# EAGLE board Flipdot (EAGLE 8.1.1)
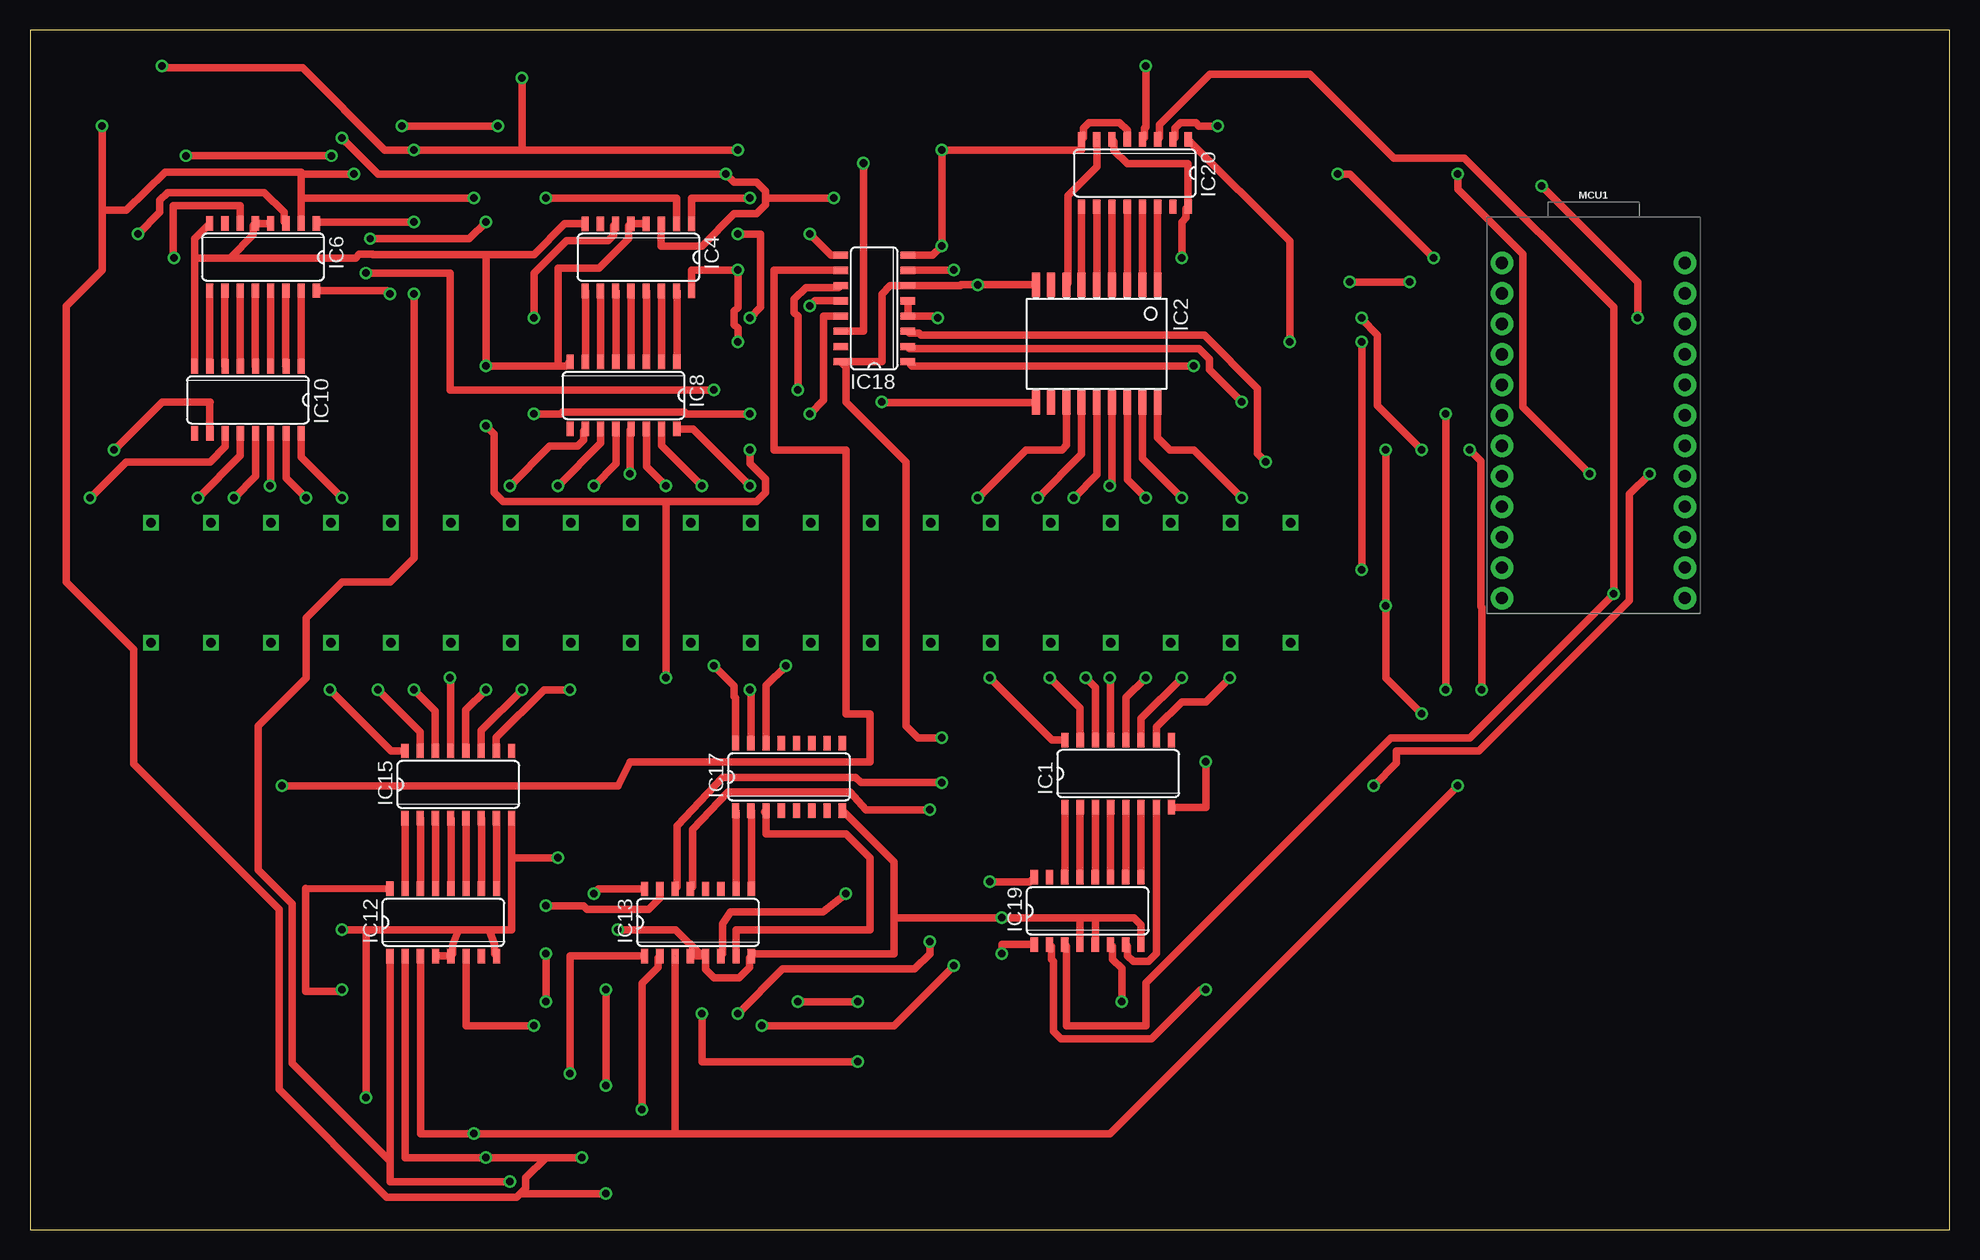
[diagram p0: board, top side]
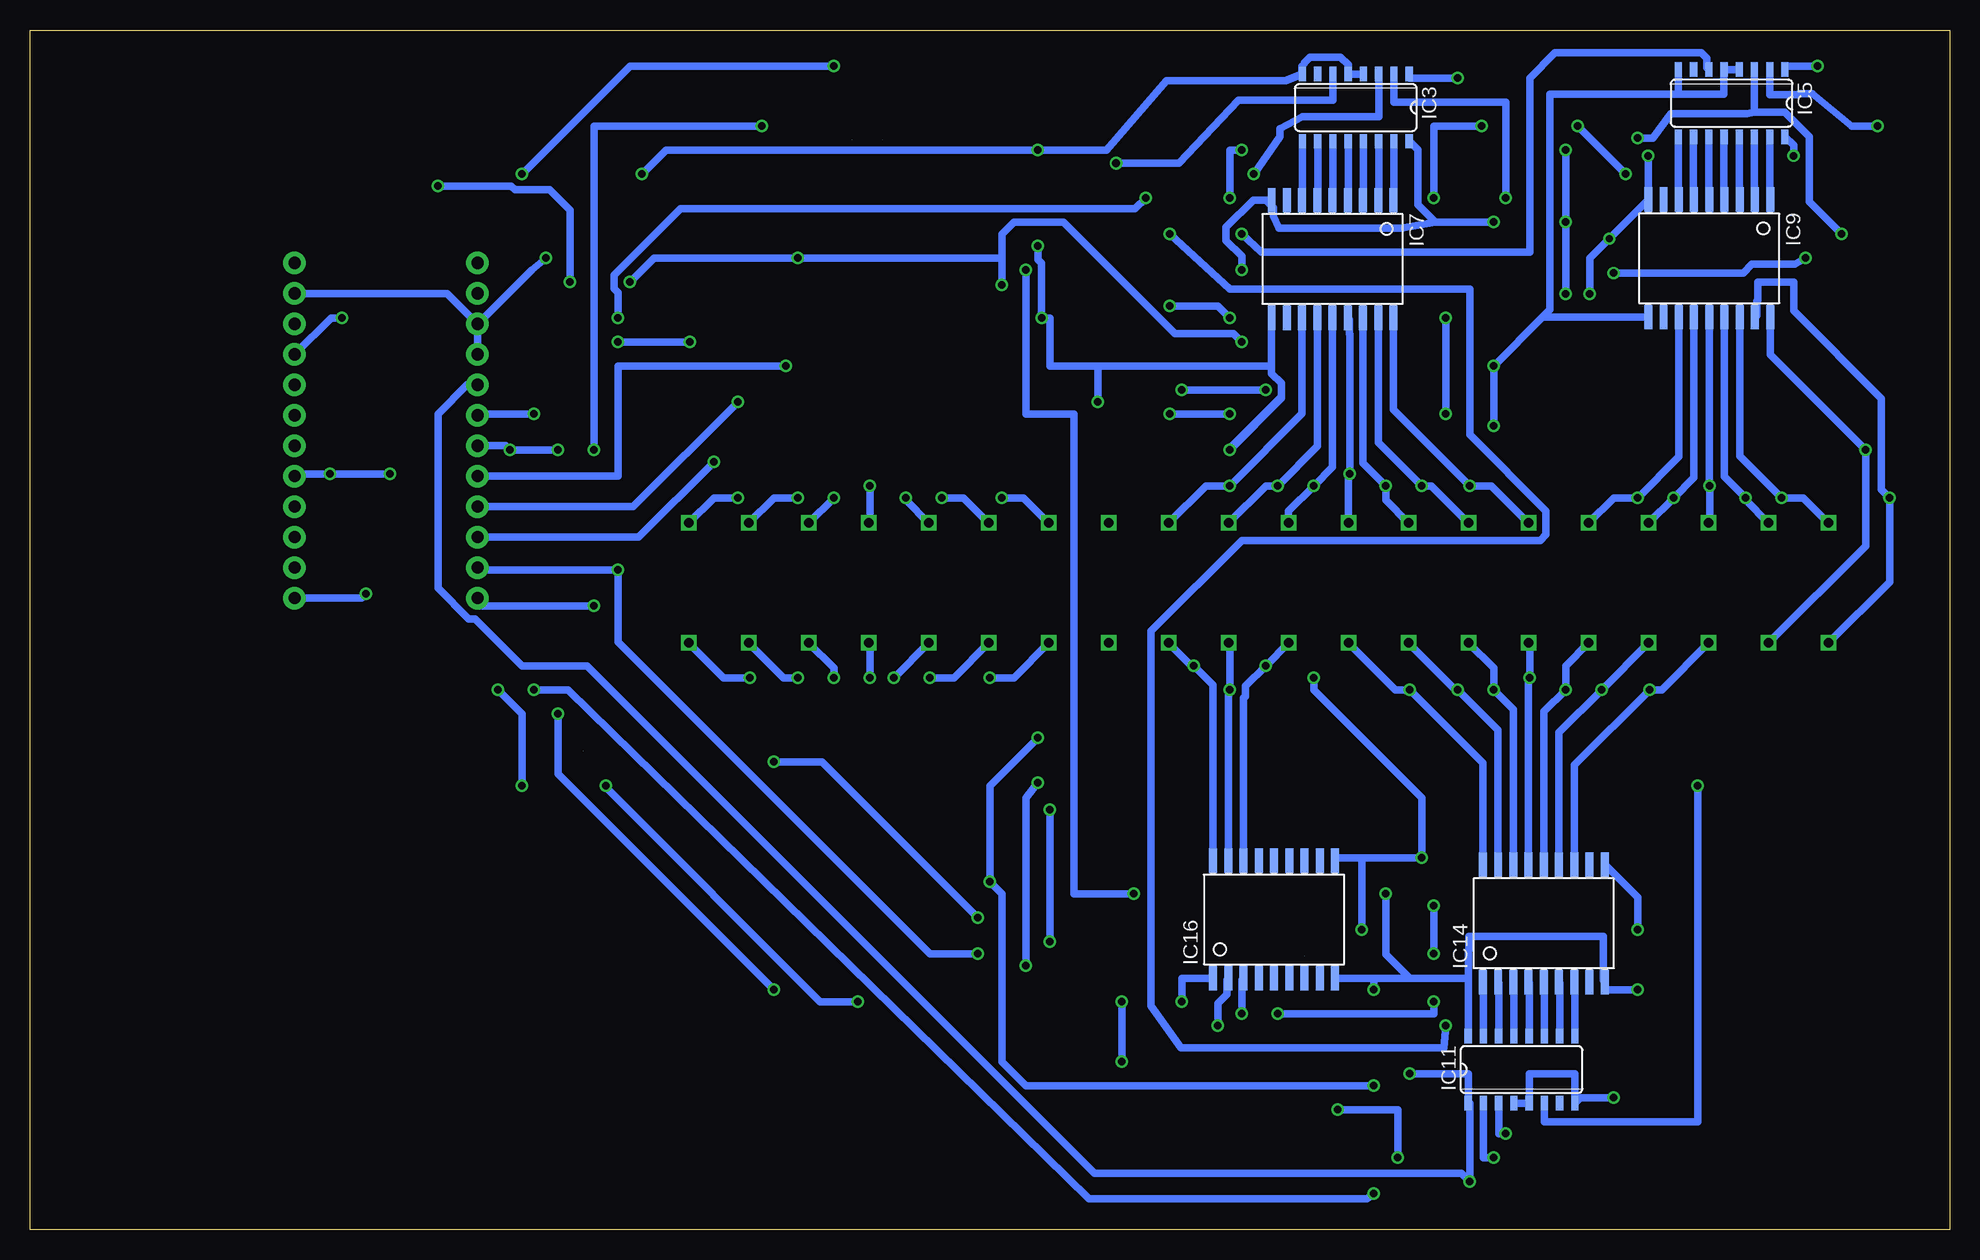
[diagram p1: board, bottom side, seen from below]

Size 160 x 100 mm. Coordinates in mm from the lower left corner, seen from the top.
Outline: 0,0 160,0 160,100 0,100 0,0
Copper layers (1*16): Top 0.035mm / dielectric 1.5mm / Bottom 0.035mm
Design rules "default *": minimum track width 0.5mm, minimum drill 0.6mm, track to track 0.5mm, track to pad 0.5mm, pad to pad 0.5mm, via to via 0.5mm, smd to smd 0.5mm, copper to edge 1.5mm, drill to drill 1mm, minimum pad ring 10mil, minimum via ring 8mil, stop-mask expansion 4mil, vias tented up to drill 0mil, thermal gap 10mil

## Footprints (pad centres in the part's own frame; a part is rotated, then mirrored left to right if it is on the bottom)
SO16 = smd 0.6 x 1.2: 1 -4.445,-2.8; 2 -3.175,-2.8; 3 -1.905,-2.8; 4 -0.635,-2.8; 5 0.635,-2.8; 6 1.905,-2.8; 7 3.175,-2.8; 8 4.445,-2.8; 9 4.445,2.8; 10 3.175,2.8; 11 1.905,2.8; 12 0.635,2.8; 13 -0.635,2.8; 14 -1.905,2.8; 15 -3.175,2.8; 16 -4.445,2.8
SO18W = smd 0.66 x 2.032: 1 -5.08,-4.902; 2 -3.81,-4.902; 3 -2.54,-4.902; 4 -1.27,-4.902; 5 0,-4.902; 6 1.27,-4.902; 7 2.54,-4.902; 8 3.81,-4.902; 9 5.08,-4.902; 10 5.08,4.902; 11 3.81,4.902; 12 2.54,4.902; 13 1.27,4.902; 14 0,4.902; 15 -1.27,4.902; 16 -2.54,4.902; 17 -3.81,4.902; 18 -5.08,4.902
HEADER = drill 0.8 square: P$1 -45,5; P$2 -40,5; P$3 -35,5; P$4 -30,5; P$5 -25,5; P$6 -20,5; P$7 -15,5; P$8 -10,5; P$9 -5,5; P$10 0,5; P$11 5,5; P$12 10,5; P$13 15,5; P$14 20,5; P$15 25,5; P$16 30,5; P$17 35,5; P$18 40,5; P$19 45,5; P$20 50,5; P$21 -45,-5; P$22 -40,-5; P$23 -35,-5; P$24 -30,-5; P$25 -25,-5; P$26 -20,-5; P$27 -15,-5; P$28 -10,-5; P$29 -5,-5; P$30 0,-5; P$31 5,-5; P$32 10,-5; P$33 15,-5; P$34 20,-5; P$35 25,-5; P$36 30,-5; P$37 35,-5; P$38 40,-5; P$39 45,-5; P$40 50,-5
SPARKFUN_PRO_MICRO = drill 1.016 pad 1.88: 1 -7.62,12.7; 2 -7.62,10.16; 3 -7.62,7.62; 4 -7.62,5.08; 5 -7.62,2.54; 6 -7.62,0; 7 -7.62,-2.54; 8 -7.62,-5.08; 9 -7.62,-7.62; 10 -7.62,-10.16; 11 -7.62,-12.7; 12 -7.62,-15.24; 13 7.62,-15.24; 14 7.62,-12.7; 15 7.62,-10.16; 16 7.62,-7.62; 17 7.62,-5.08; 18 7.62,-2.54; 19 7.62,0; 20 7.62,2.54; 21 7.62,5.08; 22 7.62,7.62; 23 7.62,10.16; 24 7.62,12.7

## Placement (x,y rotation side)
IC1  ULN2003  [SO16]  90.71,38.01 0 top
IC2  TD62783_AFWG  [SO18W]  88.92,73.85 180 top
IC3  M74HC238  [SO16]  49.48,93.53 180 bottom
IC4  M74HC238  [SO16]  50.71,81.05 180 top
IC5  M74HC238  [SO16]  18.16,93.9 180 bottom
IC6  M74HC238  [SO16]  19.42,81.07 180 top
IC7  TD62783_AFWG  [SO18W]  51.42,80.91 180 bottom
IC8  ULN2003  [SO16]  49.47,69.54 180 top
IC9  TD62783_AFWG  [SO18W]  20.03,80.96 180 bottom
IC10  ULN2003  [SO16]  18.17,69.16 180 top
IC11  M74HC238  [SO16]  35.67,13.34 0 bottom
IC12  M74HC238  [SO16]  34.45,25.61 0 top
IC13  M74HC238  [SO16]  55.68,25.6 0 top
IC14  TD62783_AFWG  [SO18W]  33.82,25.53 0 bottom
IC15  ULN2003  [SO16]  35.69,37.1 0 top
IC16  TD62783_AFWG  [SO18W]  56.3,25.85 0 bottom
IC17  ULN2003  [SO16]  63.27,37.73 0 top
IC18  M74HC238  [SO16]  70.37,76.79 90 top
IC19  M74HC238  [SO16]  88.16,26.56 0 top
IC20  M74HC238  [SO16]  92.09,88.07 180 top
J1  HEADER  [HEADER]  60.09,53.91 180 top
MCU1  SPARKFUN_PRO_MICRO  [SPARKFUN_PRO_MICRO]  130.32,67.88 0 top

## Library data of the parts
IC1-IC20 J1 MCU1 = Flipdot

## Nets
5V: IC2.9 IC3.16 IC4.16 IC5.16 IC6.16 IC7.9 IC9.9 IC11.16 IC12.16 IC13.16 IC14.9 IC16.9 IC18.6 IC18.16 IC19.16 IC20.6 IC20.16 MCU1.21
12V: MCU1.24
A: IC3.1 IC4.1 IC5.1 IC6.1 IC11.1 IC12.1 IC13.1 MCU1.5
B: IC3.2 IC4.2 IC5.2 IC6.2 IC11.2 IC12.2 IC13.2 MCU1.6
C: IC3.3 IC4.3 IC5.3 IC6.3 IC11.3 IC12.3 IC13.3 MCU1.7
C1: IC7.12 IC8.16 J1.P$29
C2: IC16.18 IC17.14 J1.P$9
C3: IC7.13 IC8.15 J1.P$30
C4: IC16.17 IC17.15 J1.P$10
C5: IC7.14 IC8.14 J1.P$31
C6: IC16.16 IC17.16 J1.P$11
C7: IC7.15 IC8.13 J1.P$32
C8: IC14.18 IC15.10 J1.P$12
C9: IC7.16 IC8.12 J1.P$33
C10: IC14.17 IC15.11 J1.P$13
C11: IC7.17 IC8.11 J1.P$34
C12: IC14.16 IC15.12 J1.P$14
C13: IC7.18 IC8.10 J1.P$35
C14: IC14.15 IC15.13 J1.P$15
C15: IC9.12 IC10.16 J1.P$36
C16: IC14.14 IC15.14 J1.P$16
C17: IC9.13 IC10.15 J1.P$37
C18: IC14.13 IC15.15 J1.P$17
C19: IC9.14 IC10.14 J1.P$38
C20: IC14.12 IC15.16 J1.P$18
C21: IC9.15 IC10.13 J1.P$39
C22: IC9.18 IC10.10 J1.P$19
C23: IC9.16 IC10.12 J1.P$40
C24: IC9.17 IC10.11 J1.P$20
E1: IC3.6 IC18.14
E2: IC4.6 IC18.13
E3: IC5.6 IC18.12
E4: IC6.6 IC18.11
E5: IC11.6 IC18.10
E6: IC12.6 IC18.9
E7: IC13.6 IC18.7
EA: IC18.1 MCU1.8
EB: IC18.2 MCU1.9
EC: IC18.3 MCU1.10
GND: IC1.8 IC2.10 IC3.4 IC3.5 IC3.8 IC4.4 IC4.5 IC4.8 IC5.4 IC5.5 IC5.8 IC6.4 IC6.5 IC6.8 IC7.10 IC8.8 IC9.10 IC10.8 IC11.4 IC11.5 IC11.8 IC12.4 IC12.5 IC12.8 IC13.4 IC13.5 IC13.8 IC14.10 IC15.8 IC16.10 IC17.8 IC18.4 IC18.5 IC18.8 IC19.4 IC19.5 IC19.8 IC20.5 IC20.8 MCU1.3 MCU1.4 MCU1.23
N$1: IC2.18 J1.P$21
N$2: IC2.17 J1.P$22
N$3: IC2.16 J1.P$23
N$4: IC2.15 J1.P$24
N$5: IC2.14 J1.P$25
N$6: IC2.13 J1.P$26
N$7: IC2.12 J1.P$27
N$8: IC1.16 J1.P$7
N$9: IC1.15 J1.P$6
N$10: IC1.14 J1.P$5
N$11: IC1.13 J1.P$4
N$12: IC1.12 J1.P$3
N$13: IC1.11 J1.P$2
N$14: IC1.10 J1.P$1
N$15: IC1.1 IC19.14
N$16: IC1.2 IC19.13
N$17: IC1.3 IC19.12
N$18: IC1.4 IC19.11
N$19: IC1.5 IC19.10
N$20: IC1.6 IC19.9
N$21: IC1.7 IC19.7
N$24: IC2.1 IC20.14
N$25: IC2.2 IC20.13
N$26: IC2.3 IC20.12
N$27: IC2.4 IC20.11
N$28: IC2.5 IC20.10
N$29: IC2.6 IC20.9
N$30: IC2.7 IC20.7
N$63: IC11.15 IC14.1
N$64: IC11.14 IC14.2
N$65: IC11.13 IC14.3
N$66: IC11.12 IC14.4
N$67: IC11.11 IC14.5
N$68: IC11.10 IC14.6
N$69: IC11.9 IC14.7
N$70: IC12.15 IC15.1
N$71: IC12.14 IC15.2
N$72: IC12.13 IC15.3
N$73: IC12.12 IC15.4
N$74: IC12.11 IC15.5
N$75: IC12.10 IC15.6
N$76: IC12.9 IC15.7
N$77: IC13.15 IC16.1
N$78: IC13.14 IC16.2
N$79: IC13.13 IC16.3
N$80: IC13.10 IC17.1
N$81: IC13.9 IC17.2
N$82: IC13.7 IC17.3
N$83: IC3.15 IC7.1
N$84: IC3.14 IC7.2
N$85: IC3.13 IC7.3
N$86: IC3.12 IC7.4
N$87: IC3.11 IC7.5
N$88: IC3.10 IC7.6
N$89: IC3.9 IC7.7
N$90: IC4.15 IC8.1
N$91: IC4.14 IC8.2
N$92: IC4.13 IC8.3
N$93: IC4.12 IC8.4
N$94: IC4.11 IC8.5
N$95: IC4.10 IC8.6
N$96: IC4.9 IC8.7
N$97: IC5.15 IC9.1
N$98: IC5.14 IC9.2
N$99: IC5.13 IC9.3
N$100: IC5.12 IC9.4
N$101: IC5.11 IC9.5
N$102: IC5.10 IC9.6
N$103: IC5.9 IC9.7
N$104: IC6.15 IC10.1
N$105: IC6.14 IC10.2
N$106: IC6.13 IC10.3
N$107: IC6.12 IC10.4
N$108: IC6.11 IC10.5
N$109: IC6.10 IC10.6
N$110: IC6.9 IC10.7
RA: IC19.1 IC20.1 MCU1.11
RB: IC19.2 IC20.2 MCU1.12
RC: IC19.3 IC20.3 MCU1.13
RE: IC19.6 IC20.4 MCU1.17

## Tracks (layer width: path | path; a pad name or v marks a point on that pad's centre or on a via)
5V  (via drill 0.6, 0.65)
  Top 0.61: v47,28 47.4,28.4 IC13.16 | IC12.16 22.98,28.43 22.98,19.87 26,19.87 v26,20 | v48,20 v48,12 | v80,29 83.36,29 IC19.16 | v76,41 74,41 73,42 73,64 68,69 68,71.92 IC18.16 71,72.34 71,78 71.69,78.69 IC18.6 76.45,78.69 76.46,78.69 77.54,78.69 77.6,78.75 v79,78.75 IC2.9 | IC6.16 29.73,78.27 v30,78 | v25.13,89.51 v13,89.51 | v38,84 36.62,82.62 v28.35,82.62 | IC4.16 55.16,80 v59,80 59,76.85 58.69,76.54 58.69,75.46 59,75.15 v59,74 | IC20.6 90.35,90.71 90.35,89.94 91.46,88.83 96.54,88.83 IC20.16 96.37,85.11 96.37,84.34 96,83.97 v96,81 | v134,76 134,79 v126,87 | v115,79 v110,79
  Bottom 0.61: 40.12,20.95 40.12,21.89 40.07,24.45 28.84,24.45 28.87,21.97 28.87,20.76 IC14.9 28.74,20 v26,20 | 40.12,20.95 IC11.16 | IC16.9 48,20.95 | 48,20.95 45,20.95 | 45,20.95 40.12,20.95 | 45,20.95 47,22.95 v47,28 | 48,20.95 v48,20 | v48,12 77,12 79,14 79,28 v80,29 80,37 v76,41 | v30,78 30,80.97 v28.35,82.62 IC9.9 25.11,88.89 v25.13,89.51 | v13,89.51 13,90.38 IC5.16 | IC3.16 44.31,90 44.31,85.46 42.85,84 | 42.85,84 v38,84 | v59,80 59,81.15 60.31,82.46 60.31,83.54 58.04,85.81 57,85.81 | 57,85.81 IC7.9 | v59,74 59.69,74.69 64.54,74.69 73.85,84 78,84 79,83 79,81 | 79,81 v79,78.75 | 57,85.81 56.37,85.18 56.37,84.47 55.9,83.48 45.68,83.48 45.67,83.49 42.85,84 | 79,81 v96,81 108,81 v110,79 | MCU1.21 134.9,76 v134,76 | v126,87 119.89,87 119.55,86.67 116.67,86.67 115,85 v115,79
A  (via drill 0.6)
  Top 0.61: IC12.1 30.01,5.7 | v40,4 30.01,4 30.01,5.7 | IC13.1 45,22.8 v45,13 | v32,78 32,56 30,54 26,54 23,51 23,46 19,42 19,30 21.87,27.13 21.87,13.84 30.01,5.7 | v32,84 24,84 IC6.1 | v11,97 11.15,96.85 22.72,96.85 29.57,90 v32,90 41,90 | 41,90 v41,96 | 41,90 v59,90 | v60,86 55.16,86 IC4.1
  Bottom 0.61: v45,13 40.12,13 IC11.1 40,10.54 v40,4 40.69,4.69 71.26,4.69 113.57,47 119,47 122.89,50.89 123.42,50.89 126,53.47 126,68 123.58,70.42 MCU1.5 | v32,78 v32,84 v32,90 | v11,97 13.72,97 IC5.1 | v41,96 45.04,96 IC3.1 | v59,90 60,90 v60,86
B  (via drill 0.6, 0.65)
  Top 0.61: IC12.2 31.28,6 v38,6 43,6 | IC13.2 52.34,22.63 52.34,21.87 51,20.52 v51,10 | v46,6 43,6 | 40.85,3 41.31,3.46 41.31,4.31 43,6 | IC6.2 22.6,86 | 22.6,88 22.6,88.13 11.25,88.13 8,85 6,85 | 6,85 6,80 3,77 3,54 8.63,48.37 8.63,38.8 20.76,26.67 20.76,11.68 29.75,2.69 40.54,2.69 40.85,3 | 6,85 v6,92 | 22.6,88 22.6,86 | 22.6,86 v37,86 | 22.6,88 v27,88 | v31,92 v39,92 | v43,86 53.89,86 IC4.2 | 40.85,3 v48,3 | v118,45 v118,68
  Bottom 0.61: v38,6 38.85,6 IC11.2 | v51,10 46,10 v46,6 | IC5.2 14.99,94.6 12.74,94.6 12.54,94.67 11.46,94.67 8.15,92 v6,92 | v37,86 37,94 46.31,94 IC3.2 | v27,88 v31,92 | v39,92 43,92 v43,86 | v48,3 48.58,2.58 71.72,2.58 115.14,45 v118,45 | v118,68 122.58,68 MCU1.6
C  (via drill 0.6, 0.65)  (1 unrouted)
  Top 0.61: IC12.3 32.55,8 v37,8 53.77,8 | 53.77,8 IC13.3 | v119,37 90,8 53.77,8 | v121,45 121,51.87 120.95,51.92 120.95,64.05 v120,65 | IC6.3 21.17,84.03 21.17,84.8 19.51,86.45 11.48,86.45 10.83,85.8 10.83,84.83 v9,83 | v26,91 29,88 v58,88 58.69,87.31 60.54,87.31 61.31,86.54 61.31,86 | IC4.3 52.62,82 56,82 58.69,84.69 60.54,84.69 61.31,85.46 61.31,86 | 61.31,86 v67,86 | v111,76 111,75.89 112.33,74.55 112.33,68.67 v116,65
  Bottom 0.61: v37,8 37.58,8 IC11.3 | v119,37 119,43 v121,45 | MCU1.7 120.34,65.34 v120,65 v116,65 | IC5.3 16.26,93.14 | v9,83 11.69,85.69 11.69,91.11 13.72,93.14 16.26,93.14 | 16.26,93.14 16.89,93.01 23.24,93.01 24.75,91 v26,91 | v58,88 55.8,91.09 55.8,91.79 53.93,92.77 47.58,92.77 IC3.3 | v67,86 67.89,85.11 105.78,85.11 111.33,79.55 111.33,78.45 111,78.11 v111,76
C1  (via drill 0.6)
  Top 0.61: v60,62 55.26,66.74 IC8.16
  Bottom 0.61: J1.P$29 62,62 v60,62 53.96,68.04 IC7.12
C2  (via drill 0.6)
  Top 0.61: v63,47 61.36,45.36 IC17.14
  Bottom 0.61: J1.P$9 63.18,47 v63,47 61.38,45.38 IC16.18
C3  (via drill 0.6)
  Top 0.61: v56,62 52.65,65.35 IC8.15
  Bottom 0.61: J1.P$30 57,62 v56,62 52.69,65.31 IC7.13
C4  (via drill 0.6)
  Top 0.61: v60,45 60.09,44.91 IC17.15
  Bottom 0.61: J1.P$10 60,48.82 v60,45 60.11,44.89 IC16.17
C5  (via drill 0.6)
  Top 0.61: v53,62 51.38,63.62 IC8.14
  Bottom 0.61: J1.P$31 55.09,59.91 v53,62 51.42,63.58 IC7.14
C6  (via drill 0.6)
  Top 0.61: v57,47 58.69,45.31 58.69,44.46 58.82,44.33 IC17.16
  Bottom 0.61: J1.P$11 v57,47 58.69,45.31 58.69,44.46 58.84,44.31 IC16.16
C7  (via drill 0.6)
  Top 0.61: v50,63 50,66.63 IC8.13
  Bottom 0.61: J1.P$32 50.09,62.91 v50,63 50,74.64 50.02,74.66 50.02,75.88 IC7.15
C8  (via drill 0.6)
  Top 0.61: v45,45 42.85,45 38.87,41.02 IC15.10
  Bottom 0.61: J1.P$12 46.18,45 v45,45 38.9,38.9 IC14.18
C9  (via drill 0.6)
  Top 0.61: v47,62 48.84,63.84 IC8.12
  Bottom 0.61: J1.P$33 47,60.82 v47,62 48.88,63.88 IC7.16
C10  (via drill 0.6)
  Top 0.61: v41,45 37.6,41.6 IC15.11
  Bottom 0.61: J1.P$13 41.18,45 v41,45 37.63,41.63 IC14.17
C11  (via drill 0.6)
  Top 0.61: v44,62 47.57,65.57 IC8.11
  Bottom 0.61: J1.P$34 43.18,62 v44,62 47.61,65.61 IC7.17
C12  (via drill 0.6)
  Top 0.61: v38,45 36.33,43.33 IC15.12
  Bottom 0.61: J1.P$14 38,46.82 v38,45 36.36,43.36 IC14.16
C13  (via drill 0.6)
  Top 0.61: v40,62 43.33,65.33 45.66,65.33 46.13,65.8 46.13,66.57 IC8.10
  Bottom 0.61: J1.P$35 38.18,62 v40,62 46.34,68.34 IC7.18
C14  (via drill 0.6)
  Top 0.61: v35,46 35.06,45.94 IC15.13
  Bottom 0.61: J1.P$15 35,48.82 v35,46 35.09,45.91 IC14.15
C15  (via drill 0.6)
  Top 0.61: v26,61 22.61,64.39 IC10.16
  Bottom 0.61: J1.P$36 28,61 v26,61 22.57,64.43 IC9.12
C16  (via drill 0.6)
  Top 0.61: v32,45 33.79,43.21 IC15.14
  Bottom 0.61: J1.P$16 32,47 v32,45 33.82,43.18 IC14.14
C17  (via drill 0.6)
  Top 0.61: v23,61 21.34,62.66 IC10.15
  Bottom 0.61: J1.P$37 v23,61 21.3,62.7 IC9.13
C18  (via drill 0.6)
  Top 0.61: v29,45 32.52,41.48 IC15.15
  Bottom 0.61: J1.P$17 v29,45 32.55,41.45 IC14.13
C19  (via drill 0.6)
  Top 0.61: v20,62 20.07,62.07 IC10.14
  Bottom 0.61: J1.P$38 20,59 v20,62 20.03,62.03 IC9.14
C20  (via drill 0.6)
  Top 0.61: v25,45 30.1,39.9 IC15.16
  Bottom 0.61: J1.P$18 24,45 v25,45 31.28,38.72 IC14.12
C21  (via drill 0.6)
  Top 0.61: v17,61 18.8,62.8 IC10.13
  Bottom 0.61: J1.P$39 17,60.82 v17,61 18.76,62.76 IC9.15
C22  (via drill 0.6)
  Top 0.61: v7,65 11,69 15,69 14.99,68.99 IC10.10
  Bottom 0.61: J1.P$19 7,57 v7,65 14.95,72.95 IC9.18
C23  (via drill 0.6)
  Top 0.61: v14,61 17.53,64.53 IC10.12
  Bottom 0.61: J1.P$40 12.18,61 v14,61 17.49,64.49 IC9.16
C24  (via drill 0.6)
  Top 0.61: v5,61 8,64 15,64 16.26,65.26 IC10.11
  Bottom 0.61: J1.P$20 5,54 v5,61 5.69,61.69 5.69,69.29 13,76.6 13,79 16,79 16,77.49 16.08,77.41 16.08,76.19 IC9.17
E1  (via drill 0.65)
  Top 0.61: IC18.14 69.47,74.89 v69.47,88.9
  Bottom 0.61: IC3.6 51.39,94.14 59.26,94.14 64.24,88.9 v69.47,88.9
E2  (via drill 0.6)
  Top 0.61: v42,68 44.25,68 44.4,68.14 54.55,68.14 54.69,68 v60,68 | v65,68 66.17,69.17 66.17,76.16 IC18.13 | IC4.6 48.64,83.68 48.64,82.91 48.17,82.44 44.72,82.44 42,79.72 v42,76
  Bottom 0.61: v42,76 v42,68 | v60,68 v65,68
E3  (via drill 0.6)
  Top 0.61: v65,77 65.42,77.42 IC18.12 | v60,76 60.89,76.89 60.89,83 v59,83
  Bottom 0.61: IC5.6 20.23,96.86 20.23,97.63 20.71,98.1 32.9,98.1 35,96 35,81.49 57.37,81.49 v59,83 | v60,76 61,77 v65,77
E4  (via drill 0.6)
  Top 0.61: IC6.6 17.52,85.34 11.94,85.34 11.94,81 v12,81 | v28,79.75 35,79.75 35,70 v57,70 | IC18.11 67.41,78.53 64.69,78.53 63.69,77.54 63.69,76.46 64,76.15 v64,70
  Bottom 0.61: v28,79.75 17.2,79.75 16.46,80.49 12.89,80.49 v12,81 | v57,70 v64,70
E5  (via drill 0.6)
  Top 0.61: v21,37 49,37 50,39 70,39 70,43 68,43 68,65 62,65 62,79.97 IC18.10
  Bottom 0.61: IC11.6 33.77,9 21,9 v21,37
E6  (via drill 0.6)
  Top 0.61: IC12.6 36.36,17 v42,17 | v65,83 66.77,81.23 IC18.9
  Bottom 0.61: v42,17 42.13,15.13 64.04,15.13 66.55,18.63 66.55,49.9 58.99,57.45 34.1,57.45 33.63,57.92 33.63,59.9 40,66.27 40,78.38 60,78.38 v65,83
E7  (via drill 0.6)
  Top 0.61: IC13.6 57.75,22.96 57.75,25.46 58.4,26.49 66.11,26.49 v68,28 | v77,80 73.17,80 IC18.7
  Bottom 0.61: v68,28 73,28 73,68 77,68 v77,80
EA  (via drill 0.65)
  Top 0.61: IC18.1 73.52,72 v97,72
  Bottom 0.61: v97,72 111,72 111,62.8 MCU1.8
EB  (via drill 0.65)
  Top 0.61: IC18.2 73.33,73.45 97.43,73.45 98.33,72.55 98.33,71.67 v101,69
  Bottom 0.61: v101,69 109.74,60.26 MCU1.9
EC  (via drill 0.65)
  Top 0.61: IC18.3 73.33,74.72 74.1,74.72 74.26,74.56 97.89,74.56 102.33,70.12 102.33,64.67 v103,64
  Bottom 0.61: v103,64 109.28,57.72 MCU1.10
GND  (via drill 0.6, 0.65)  (1 unrouted)
  Top 0.61: IC10.8 13.72,81 | 13.72,81 13.72,82.61 IC6.8 | 13.72,81 16.69,81 | 16.69,81 18.62,82.93 18.62,83.7 IC6.5 IC6.4 | 56,22.8 IC13.4 | 56,22.8 IC13.5 56.32,21.68 57,21 59.1,21 59.97,21.87 59.97,22.64 IC13.8 60.13,23 72,23 72,26 | 87.53,26 v81,26 72,26 | 88.8,26 87.53,26 | 88.8,26 92,26 92.61,25.39 IC19.8 | IC19.4 87.53,26 | IC19.5 88.8,26 | 72,26 72,30.64 IC17.8 | IC12.4 IC12.5 35.25,22.96 35.25,23.73 35.72,24.97 | 38.26,24.97 38.73,23.74 38.73,22.97 IC12.8 | 35.72,24.97 38.26,24.97 | 38.26,24.97 40.14,24.97 40.14,31 | 40.14,31 IC15.8 | 40.14,31 v44,31 | 35.72,24.97 28,24.97 | 28,24.97 27.02,24.97 v26,25 | 28,24.97 v28,11 | v49,25 53.8,25 56,22.8 | 44,72 44.69,72 IC8.8 | 44,72 v38,72 38,81.29 | IC4.4 IC4.5 49.92,83.69 49.92,82.62 47.45,80.15 44,80.15 44,72 | 16.69,81 27.15,81 27.46,81.31 28.54,81.31 28.56,81.29 38,81.29 | 38,81.29 42,81.29 44.56,83.85 IC4.8 | v60,65 60,63.85 61.31,62.54 61.31,61.46 60.54,60.69 53,60.69 | v38,67 38.69,66.31 38.69,61.46 39.46,60.69 53,60.69 | v53,46 53,60.69 | v75.67,76 75.67,76.16 IC18.4 IC18.5 | IC18.8 75.23,81.23 v76,82 v76,90 87.65,90 IC20.8 87.81,91.04 87.81,91.81 88.29,92.28 90.82,92.28 91.46,91.64 IC20.5 | IC2.10 71,68.95 v71,69 | v117,81 110,88 v109,88 | IC1.8 98,35.2 v98,39
  Bottom 0.61: IC11.4 IC11.5 35.04,13 31.23,13 IC11.8 30.77,11 v28,11 | 49,31 v44,31 44,36 53,45 v53,46 | 49,31 51.22,31 IC16.10 | v26,25 26,27.69 IC14.10 | 49,31 v49,25 | IC9.10 33.94,76.06 | 33.94,76.06 v38,72 v38,67 | IC5.4 IC5.5 18.8,94.64 22.61,94.64 | IC5.8 22.61,94.64 | 33.94,76.06 33.31,76.69 33.31,94.64 22.61,94.64 | IC7.10 56.5,72 | 55.69,69.46 55.69,69.31 v60,65 60,65.15 55.69,69.46 | 55.69,69.46 55.69,70.54 56.5,71.35 56.5,72 | 75.89,76 v75.67,76 | 56.5,72 71,72 | 71,72 75,72 75,76 v75.67,76 | v76,82 76,80.85 75.69,80.54 75.69,76.03 v75.67,76 | IC3.4 IC3.5 50.12,97.1 50.76,97.74 53.29,97.74 53.77,97.27 53.77,97.23 54,97 54,96.33 | 54,96.33 IC3.8 | 54,96.33 55.34,95.75 65.26,95.75 70.25,90 v76,90 107,90 v109,88 | v71,69 71,72 | MCU1.4 MCU1.3 | MCU1.3 125.24,78.04 MCU1.23 | MCU1.3 118.2,80 v117,81 | v98,39 94,39 v81,26
N$1  (via drill 0.6)
  Top 0.61: v101,61 97,65 95,65 94,66 IC2.18
  Bottom 0.61: J1.P$21 103,61 v101,61
N$2  (via drill 0.6)
  Top 0.61: v96,61 92.73,64.27 IC2.17
  Bottom 0.61: J1.P$22 98,61 v96,61
N$3  (via drill 0.6)
  Top 0.61: v93,61 91.46,62.54 IC2.16
  Bottom 0.61: J1.P$23 v93,61
N$4  (via drill 0.6)
  Top 0.61: v90,62 90.19,62.19 IC2.15
  Bottom 0.61: J1.P$24 90,59 v90,62
N$5  (via drill 0.6)
  Top 0.61: v87,61 88.92,62.92 IC2.14
  Bottom 0.61: J1.P$25 87,60.82 v87,61
N$6  (via drill 0.6)
  Top 0.61: v84,61 87.65,64.65 IC2.13
  Bottom 0.61: J1.P$26 82.18,61 v84,61
N$7  (via drill 0.6)
  Top 0.61: v79,61 83,65 86,65 86.38,65.38 IC2.12
  Bottom 0.61: J1.P$27 77.18,61 v79,61
N$8  (via drill 0.6)
  Top 0.61: v80,46 85.19,40.8 IC1.16
  Bottom 0.61: J1.P$7 78,46 v80,46
N$9  (via drill 0.6)
  Top 0.61: v85,46 87.53,43.47 IC1.15
  Bottom 0.61: J1.P$6 83,46 v85,46
N$10  (via drill 0.6)
  Top 0.61: v88,46 88.81,45.2 IC1.14
  Bottom 0.61: J1.P$5 v88,46
N$11  (via drill 0.6)
  Top 0.61: v90,46 90.08,45.92 IC1.13
  Bottom 0.61: J1.P$4 90,48.82 v90,46
N$12  (via drill 0.6)
  Top 0.61: v93,46 91.34,44.34 IC1.12
  Bottom 0.61: J1.P$3 93,46.82 v93,46
N$13  (via drill 0.6)
  Top 0.61: v96,46 92.61,42.62 IC1.11
  Bottom 0.61: J1.P$2 97.18,46 v96,46
N$14  (via drill 0.6)
  Top 0.61: v100,46 98,44 96,44 93.89,41.88 IC1.10
  Bottom 0.61: J1.P$1 102.18,46 v100,46
N$15
  Top 0.61: IC1.1 86.25,35.2 IC19.14
N$16
  Top 0.61: IC1.2 87.53,35.2 IC19.13
N$17
  Top 0.61: IC1.3 88.8,35.2 IC19.12
N$18
  Top 0.61: IC1.4 90.06,35.2 IC19.11
N$19
  Top 0.61: IC1.5 91.33,35.2 IC19.10
N$20
  Top 0.61: IC1.6 92.61,35.2 IC19.9
N$21
  Top 0.61: IC19.7 91.5,23.6 91.5,22.83 91.97,22.36 93.24,22.36 93.89,23 IC1.7
N$24
  Top 0.61: IC20.14 IC2.1
N$25
  Top 0.61: IC20.13 IC2.2
N$26
  Top 0.61: IC20.12 IC2.3
N$27
  Top 0.61: IC20.11 IC2.4
N$28
  Top 0.61: IC20.10 IC2.5
N$29
  Top 0.61: IC20.9 IC2.6
N$30  (1 unrouted)
  Top 0.61: IC2.7 86.51,78.89 86.51,86.18 88.92,88.59 IC20.7
N$63
  Bottom 0.61: IC14.1 38.85,20.58 IC11.15
N$64
  Bottom 0.61: IC14.2 37.58,20.58 IC11.14
N$65
  Bottom 0.61: IC14.3 36.31,20.58 IC11.13
N$66
  Bottom 0.61: IC14.4 35.04,20.58 IC11.12
N$67
  Bottom 0.61: IC14.5 33.77,20.58 IC11.11
N$68
  Bottom 0.61: IC14.6 32.5,20.58 IC11.10
N$69
  Bottom 0.61: IC14.7 31.23,20.58 IC11.9
N$70
  Top 0.61: IC15.1 31.28,34.27 IC12.15
N$71
  Top 0.61: IC15.2 32.55,34.27 IC12.14
N$72
  Top 0.61: IC15.3 33.82,34.27 IC12.13
N$73
  Top 0.61: IC15.4 35.09,34.27 IC12.12
N$74
  Top 0.61: IC15.5 36.36,34.27 IC12.11
N$75
  Top 0.61: IC15.6 37.63,34.27 IC12.10
N$76
  Top 0.61: IC15.7 38.9,34.27 IC12.9
N$77  (via drill 0.6)
  Top 0.61: v43,27 46.15,27 46.46,26.69 51.57,26.69 52.51,27.63 IC13.15 | v43,23 v43,19 | v56,18 56,14 v69,14 | v69,19 v64,19
  Bottom 0.61: v43,27 v43,23 | v43,19 43,18 v56,18 | v69,14 v69,19 | v64,19 64,20.95 IC16.1
N$78  (via drill 0.6, 0.65)
  Top 0.61: IC13.14 53.94,28.56 53.94,33.66 57.73,37.7 68.8,37.7 69.25,37.25 v76,37.25 | v61,17 72,17 v77,22
  Bottom 0.61: v61,17 61,18.84 60.24,19.6 60.24,20.81 IC16.2 | v77,22 77,36 v76,37.25
N$79  (via drill 0.6, 0.65)
  Top 0.61: v59,18 62.71,21.71 73.71,21.71 75,23 v75,24 | IC13.13 55.21,28.56 55.21,33.36 58.19,36.47 68.34,36.47 69.68,35 v75,35
  Bottom 0.61: v59,18 59,19.57 58.98,19.6 58.98,20.81 IC16.3 | v75,24 v75,35
N$80
  Top 0.61: IC17.1 58.86,34.9 IC13.10
N$81
  Top 0.61: IC17.2 60.13,34.9 IC13.9
N$82
  Top 0.61: 61.24,34.81 IC17.3 61.36,33 68,33 70,31 70,25 58.86,25 IC13.7
N$83
  Bottom 0.61: IC7.1 46.31,85.85 IC3.15
N$84
  Bottom 0.61: IC7.2 47.58,85.85 IC3.14
N$85
  Bottom 0.61: IC7.3 48.85,85.85 IC3.13
N$86
  Bottom 0.61: IC7.4 50.12,85.85 IC3.12
N$87
  Bottom 0.61: IC7.5 51.39,85.85 IC3.11
N$88
  Bottom 0.61: IC7.6 52.66,85.85 IC3.10
N$89
  Bottom 0.61: IC7.7 53.93,85.85 IC3.9
N$90
  Top 0.61: IC4.15 53.92,78.21 IC8.1
N$91
  Top 0.61: IC4.14 52.65,78.21 IC8.2
N$92
  Top 0.61: IC4.13 51.38,78.21 IC8.3
N$93
  Top 0.61: IC4.12 50.11,78.21 IC8.4
N$94
  Top 0.61: IC4.11 48.84,78.21 IC8.5
N$95
  Top 0.61: IC4.10 47.57,78.21 IC8.6
N$96
  Top 0.61: IC4.9 46.3,78.21 IC8.7
N$97
  Bottom 0.61: IC9.1 14.99,85.91 IC5.15
N$98
  Bottom 0.61: IC9.2 16.26,85.91 IC5.14
N$99
  Bottom 0.61: IC9.3 17.53,85.91 IC5.13
N$100
  Bottom 0.61: IC9.4 18.8,85.91 IC5.12
N$101
  Bottom 0.61: IC9.5 20.07,85.91 IC5.11
N$102
  Bottom 0.61: IC9.6 21.34,85.91 IC5.10
N$103
  Bottom 0.61: IC9.7 22.61,85.91 IC5.9
N$104
  Top 0.61: IC10.1 22.6,71.98 IC6.15
N$105
  Top 0.61: IC10.2 21.33,71.98 IC6.14
N$106
  Top 0.61: IC6.13 20.07,78.25 IC10.3
N$107
  Top 0.61: IC10.4 18.79,71.98 IC6.12
N$108
  Top 0.61: IC6.11 17.53,78.25 IC10.5
N$109
  Top 0.61: IC10.6 16.25,71.98 IC6.10
N$110
  Top 0.61: IC6.9 14.99,78.25 IC10.7
RA  (via drill 0.65)
  Top 0.61: IC20.1 105,82.41 v105,74 | v111,74 v111,55 | IC19.1 81,23.76 v81,23
  Bottom 0.61: v105,74 v111,74 | MCU1.11 122.7,55 v111,55 111,49 85,23 v81,23
RB  (via drill 0.65)
  Top 0.61: IC20.2 95.43,91.03 95.43,91.8 95.91,92.28 97.17,92.28 97.45,92 v99,92 | v113,65 v113,52 113,46 v116,43 | IC19.2 85.14,23.6 85.14,22.53 85.31,22.37 85.31,16.54 85.96,15.89 93.46,15.89 97.57,20 v98,20
  Bottom 0.61: v99,92 113,92 v113,65 | v113,52 122.7,52 MCU1.12 | v98,20 116,38 v116,43
RC  (via drill 0.65)
  Top 0.61: IC20.3 94.16,91.03 94.16,92.1 98.37,96.31 106.69,96.31 113.67,89.33 119.55,89.33 132,76.89 v132,53 120,41 113.45,41 93.73,21.27 | IC19.3 86.42,23.6 86.42,17 93,17 93,20.55 93.73,21.27 | 93.7,21.25 93.73,21.27
  Bottom 0.61: v132,53 132.36,52.64 MCU1.13
RE  (via drill 0.65)  (1 unrouted)
  Top 0.61: v93,97 93,91.91 92.89,91.8 92.89,91.03 IC20.4 | v119,88 119,86.75 124.44,81.3 124.44,68.56 v130,63 | IC19.6 90.22,23.6 90.22,22.53 91,21.76 v91,19 | v135,63 133.33,61.33 133.33,52.45 120.78,39.89 113.91,39.89 113.91,38.91 v112,37
  Bottom 0.61: v93,97 110,97 v119,88 | v130,63 v135,63 137.74,63 MCU1.17 | v91,19 94.16,19 112,36.84 v112,37